# Altium PCB BodgeBoard_BBTSSO8.PcbDoc
Units mm, origin at the board's own origin, x right, y up, seen from the top; angles counter-clockwise.
Board outline 15 x 20 mm, 2 copper layers (Top Layer, Bottom Layer), stack 1.631 mm thick; 1 components, 30 nets, 18 pads, 0 vias.
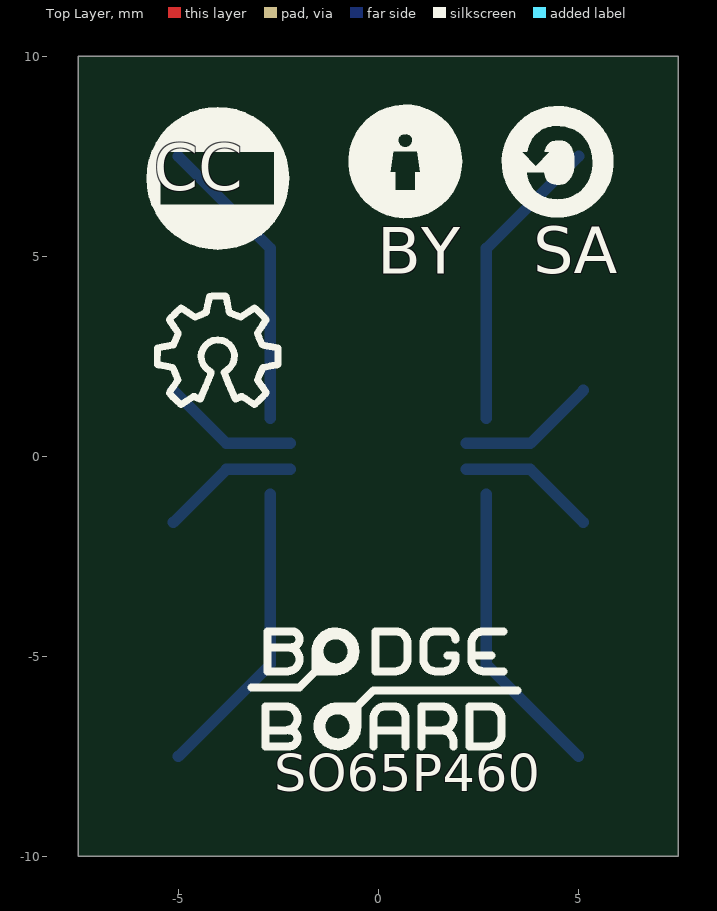
[diagram p0: Top Layer view]
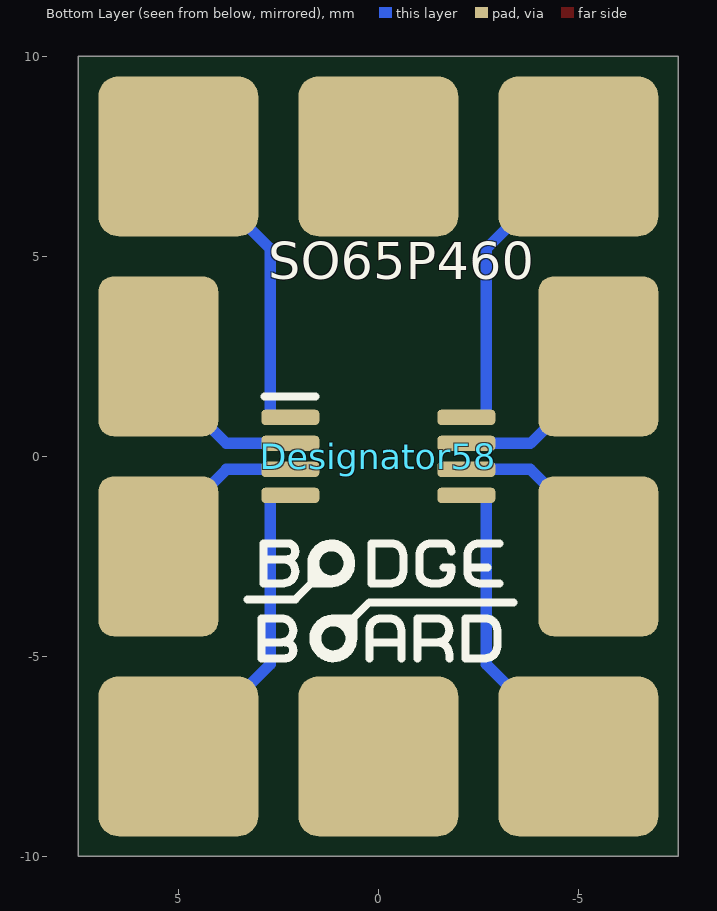
[diagram p1: Bottom Layer view, seen from below]

## Layer stack, top to bottom
Top Solder: solder mask 0.0102, Solder Resist, Dk 3.5
Top Layer: signal copper 0.0356
Dielectric 1: dielectric 1.56, FR-4, Dk 4.8
Bottom Layer: signal copper 0.0356
Bottom Solder: solder mask 0.0102, Solder Resist, Dk 3.5

## Board outline
-7.5,-10 -7.5,10 7.5,10 7.5,-10

## Design rules (kind name [scope] priority, off if disabled: settings)
Clearance [All] p1: gap=0.2 ignorepadtopadclearanceinfootprint=FALSE
MinimumSolderMaskSliver [All] p1: minsoldermaskwidth=0.15
PolygonConnect [All] p1: connectstyle=Relief reliefconductorwidth=0.254 reliefentries=4 polygonreliefangle="90 Angle" airgapwidth=0.254
RoutingVias [All] p1: holewidth=0.4 width=0.8 viastyle="Through Hole" minholewidth=0.3 minwidth=0.4 maxholewidth=0.7 maxwidth=1
SilkToSilkClearance [All] p1 off: silktosilkclearance=0
SilkToSolderMaskClearance [IsPad] p1: minsilkscreentomaskgap=0.15 clearancetoexposedcopper=TRUE
SolderMaskExpansion [All] p1: expansion=0.102 istentingtop=FALSE
Width [All] p1: maxlimit=1 minlimit=0.2 preferedwidth=0.5
27 further rules are at their usual default settings.

## Components (designator, comment, footprint, x,y, rotation, side; value= is the part's Value field where it differs from the comment)
Designator58 "Comment" SO65P490X300-8 0,0 r180 bottom locked

## Footprints (in the part's own frame and the unit in brackets; to place one, negate y for a bottom-side part, rotate by r counter-clockwise, add the part's x,y. Pads: shape width x height; smd on the part's side, far side on the other; paste and mask are expansions set on the pad)
SO65P490X300-8 [mm] "SO 0.65mm Pitch , 4.9mm Span, 3.00mm Body width, 8 Pins"
  rrect50% 1.45x0.38 smd paste+0 mask+0.05: 1(-2.2,0.975) 2(-2.2,0.325) 3(-2.2,-0.325) 4(-2.2,-0.975) 5(2.2,-0.975) 6(2.2,-0.325) 7(2.2,0.325) 8(2.2,0.975)
  silkscreen extent -2.85,1.5 -1.58,1.5, body extent -2.45,-1.5 2.45,1.5, height 1.1

## Free pads (board coordinates)
  rrect25% 4x4 smd far side mask+0.1: 1(5,7.5) 4(5,-7.5) 5(-5,-7.5) 8(-5,7.5) A(0,7.5) B(0,-7.5)
  rrect25% 3x4 smd far side mask+0.1: 2(5.5,2.5) 3(5.5,-2.5) 6(-5.5,-2.5) 7(-5.5,2.5)

## Nets (pads, with @x,y where several pads share a name; then routed paths per layer and width w, separated by ;. In a path a pad name is that pad's centre, name@x,y a point inside that pad or via, vN(x,y) a via of type N, cw(c..) or ccw(c..) an arc to the next point about the centre after c; other vN are vias at no path point)
A: 
B: 
C: 
D: 
E: 
F: 
G: 
H: 
IO1: 
IO2: 
IO3: 
IO4: 
IO5: 
IO6: 
IO7: 
IO8: 
IO9: 
IO10: 
IO11: 
IO12: 
IO13: 
IO14: 
UA1: 
UA2: 
UA3: 
UA4: 
UA5: 
UA6: 
UA7: 
UA8: 
pads on no net: Designator58.1 Designator58.2 Designator58.3 Designator58.4 Designator58.5 Designator58.6 Designator58.7 Designator58.8
copper on no net: | length 43.9
  Bottom Layer w0.28: -5.125,-1.65 -3.8,-0.325 -2.2,-0.325 ; -5.125,1.65 -3.8,0.325 -2.2,0.325 ; -5,-7.5 -2.7,-5.2 -2.7,-0.95 ; -5,7.5 -2.7,5.2 -2.7,0.95 ; 2.2,-0.325 3.8,-0.325 5.125,-1.65 ; 2.2,0.325 3.8,0.325 5.125,1.65 ; 2.7,-5.2 2.7,-0.95 ; 2.7,0.95 2.7,5.2 ; 2.704,-5.2 5.004,-7.5 ; 2.709,5.2 5.009,7.5

## Silkscreen, mask and mechanical layers (free items; w line width, h text height)
Top Overlay:
  drawing of 356 lines, arcs and shapes, not listed
  text "CC" at -5.612,6.26 h2.01
  text "BY" at -0.025,4.179 h2
  text "SA" at 3.875,4.193 h2
  text "SO65P460" at -2.6,-8.686 h1.6
Bottom Overlay:
  circle w0.2: c1.125,-4.55 r0.5
  circle w0.2: c1.175,-2.675 r0.5
  circle w0.2: c1.125,-4.55 r0.4
  circle w0.2: c1.175,-2.675 r0.4
  lines w0.2: -3.375,-3.65 0.225,-3.65 0.825,-4.25 ; -3.025,-3.175 -2.525,-3.175 ccw(c-2.525,-2.875) -2.225,-2.875 -2.225,-2.475 ccw(c-2.525,-2.475) -2.525,-2.175 -3.025,-2.175 ; -2.725,-2.775 -2.225,-2.775 ; -1.825,-2.375 cw(c-1.625,-2.375) -1.625,-2.175 -1.325,-2.175 cw(c-1.325,-2.475) -1.025,-2.475 ; -1.775,-5.05 -1.775,-4.95 cw(c-1.475,-4.95) -1.475,-4.65 ; -1.625,-2.775 -1.825,-2.775 -1.825,-2.875 ccw(c-1.525,-2.875) -1.525,-3.175 -1.325,-3.175 ccw(c-1.325,-2.875) -1.025,-2.875 -1.025,-2.475 ; -0.975,-5.05 -0.975,-4.05 -1.475,-4.05 ccw(c-1.475,-4.35) -1.775,-4.35 ccw(c-1.475,-4.35) -1.475,-4.65 ; -0.975,-4.55 cw(c-1.075,-4.55) -1.075,-4.65 -1.475,-4.65 ; -0.575,-5.05 -0.575,-4.35 cw(c-0.275,-4.35) -0.275,-4.05 -0.075,-4.05 cw(c-0.075,-4.35) 0.225,-4.35 0.225,-5.05 ; -0.575,-4.65 0.225,-4.65 ; 0.625,-4.55 0.625,-4.05 1.127,-4.05 ; 1.175,-3.175 1.675,-3.175 1.675,-2.675 ; 1.475,-2.975 2.075,-3.575 3.275,-3.575 ; 2.275,-2.575 cw(c2.275,-2.375) 2.075,-2.375 cw(c2.275,-2.375) 2.275,-2.175 2.875,-2.175 2.875,-3.175 2.375,-3.175 cw(c2.375,-2.875) 2.075,-2.875 cw(c2.375,-2.875) 2.375,-2.575 2.875,-2.575 ; 2.325,-4.65 ccw(c2.325,-4.85) 2.125,-4.85 ccw(c2.325,-4.85) 2.325,-5.05 2.925,-5.05 2.925,-4.05 2.425,-4.05 ccw(c2.425,-4.35) 2.125,-4.35 ccw(c2.425,-4.35) 2.425,-4.65 2.925,-4.65 ; -2.975,-4.349 ccw(c-2.975,-4.349) -2.975,-4.349 ; -2.975,-4.349 -2.975,-4.75 ccw(c-2.675,-4.75) -2.675,-5.05 -2.175,-5.05 -2.175,-4.05 -2.675,-4.05 ccw(c-2.675,-4.35) -2.975,-4.35 -2.975,-4.349 ; -0.625,-2.475 cw(c-0.325,-2.475) -0.325,-2.175 0.175,-2.175 0.175,-3.175 -0.325,-3.175 cw(c-0.325,-2.875) -0.625,-2.875 -0.625,-2.474 ; -0.625,-2.474 ccw(c-0.625,-2.474) -0.625,-2.474 ; -0.625,-2.475 -0.625,-2.474 ; 0.825,-4.25 0.825,-4.25
  text "SO65P460" at 2.75,4.114 h1.6
Top Solder:
  region: -1.425,6.875 -1.425,5.475 -2.425,5.475 -2.025,6.075 -1.925,6.375 -1.825,6.775 -1.825,6.875
  region: -6.625,6.875 -6.625,5.475 -5.625,5.475 -6.025,6.075 -6.125,6.375 -6.225,6.775 -6.225,6.875
  region: -6.025,6.875 ccw(c-4.125,6.875) -4.125,4.975 -4.025,4.975 -4.025,4.675 -4.125,4.675 cw(c-4.125,6.875) -6.325,6.875
  region: -2.025,6.875 cw(c-3.925,6.875) -3.925,4.975 -4.025,4.975 -4.025,4.675 -3.925,4.675 ccw(c-3.925,6.875) -1.725,6.875
  region: 0.675,5.775 cw(c0.675,7.375) -0.925,7.375 -1.525,7.375 -1.525,5.475 0.675,5.475
  region: 0.675,5.775 ccw(c0.675,7.375) 2.275,7.375 2.875,7.375 2.875,5.475 0.675,5.475
  region: 4.475,5.775 ccw(c4.475,7.375) 6.075,7.375 6.675,7.375 6.675,5.475 4.475,5.475
  region: 4.475,5.775 cw(c4.475,7.375) 2.875,7.375 2.275,7.375 2.275,5.475 4.475,5.475
  region: 4.475,8.975 ccw(c4.475,7.375) 2.875,7.375 2.275,7.375 2.275,9.275 4.475,9.275
  region: 4.475,8.975 cw(c4.475,7.375) 6.075,7.375 6.675,7.375 6.675,9.275 4.475,9.275
  region: 0.675,8.975 cw(c0.675,7.375) 2.275,7.375 2.875,7.375 2.875,9.275 0.675,9.275
  region: 0.675,8.975 ccw(c0.675,7.375) -0.925,7.375 -1.525,7.375 -1.525,9.275 0.675,9.275
  region: -4.025,8.975 cw(c-4.025,6.975) -2.025,6.975 -2.025,6.875 -1.425,6.875 -1.425,9.275 -4.025,9.275
  region: -4.025,8.975 ccw(c-4.025,6.975) -6.025,6.975 -6.025,6.875 -6.625,6.875 -6.625,9.275 -4.025,9.275
Mechanical 13:
  lines w0.1: -7.5,-10 -7.5,8.275 -7.5,10 7.5,10 7.5,-10 4.425,-10 -7.5,-10
Bottom Assembly:
  lines w0.05: -3.45,-2.205 -3.45,-1.615 ; -3.45,-0.935 -3.45,-0.345 ; -3.45,0.335 -3.45,0.925 ; -3.45,1.605 -3.45,2.195 ; 3.45,-2.205 3.45,-1.615 ; 3.45,-0.935 3.45,-0.345 ; 3.45,0.335 3.45,0.925 ; 3.45,1.6 3.45,2.19
Bottom Courtyard:
  lines w0.05: -3.7,-2.7 -3.7,2.7 3.7,2.7 3.7,-2.7 ; -0.5,0 0,0 ; 0,-0.5 0,0 ; 0,0.5 0,0 ; 0.5,0 0,0

## Text inside footprints (layer, text, board x,y; h text height)
Designator58: Bottom Assembly "1" at 2.925,0.775 h0.4